# EAGLE board Adafruit 1.3in 128x64 OLED STEMMA QT (EAGLE 9.4.1)
REV: A
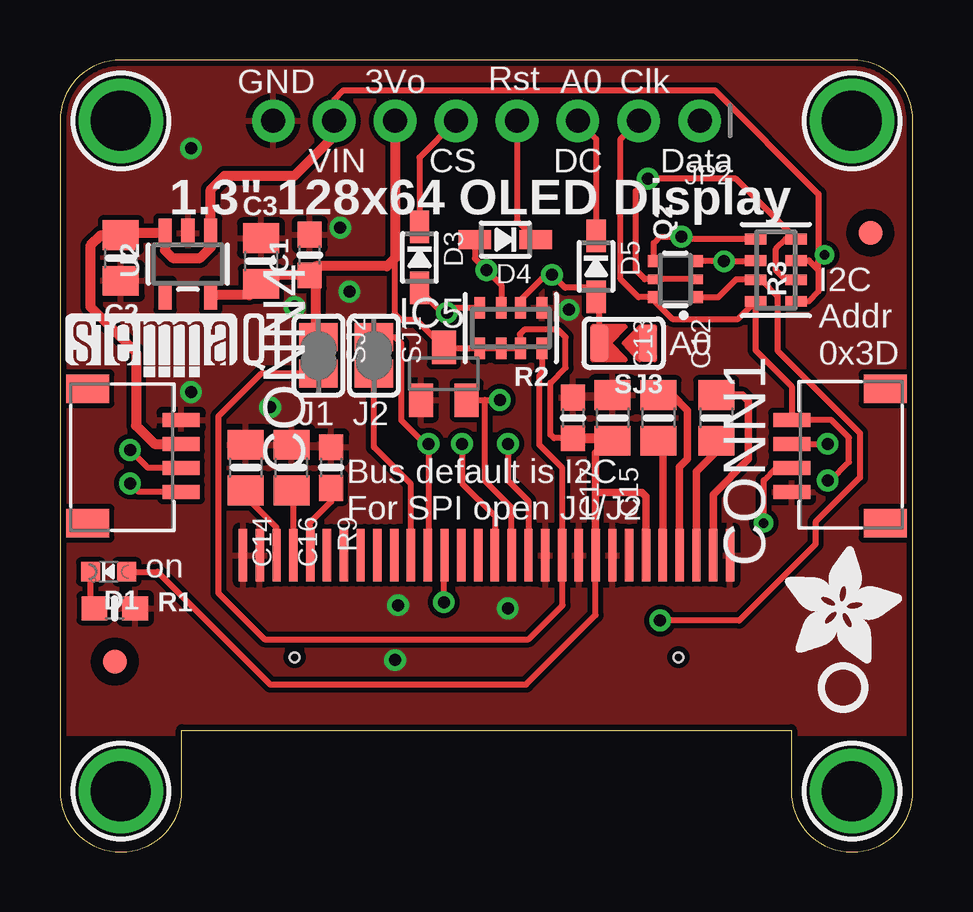
[diagram p0: board, top side]
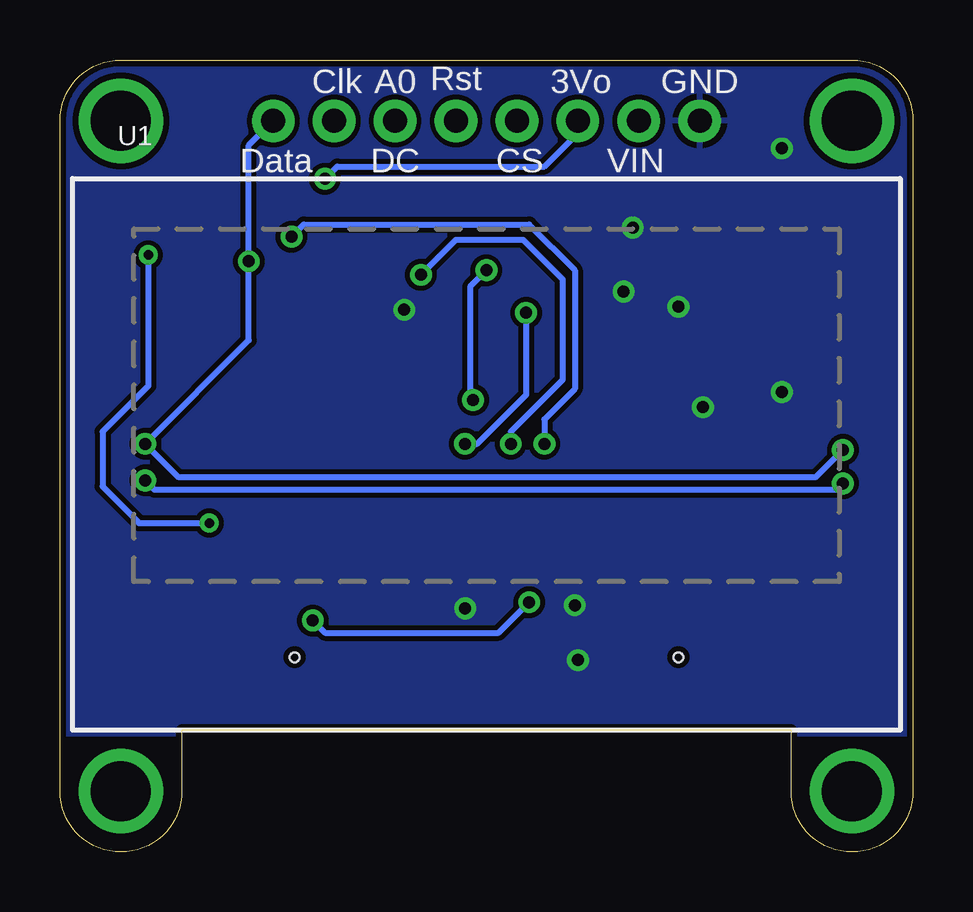
[diagram p1: board, bottom side, seen from below]

Size 35.56 x 33.02 mm. Coordinates in mm from the lower left corner, seen from the top.
Outline: 0,30.48 0,2.54 arc90 2.54,0 arc90 5.08,2.54 5.08,5.08 30.48,5.08 30.48,2.54 arc90 33.02,0 arc90 35.56,2.54 35.56,30.48 arc90 33.02,33.02 2.54,33.02 arc90 0,30.48
Copper layers (1*16): Top 0.035mm / dielectric 1.5mm / Bottom 0.035mm
Design rules "adafruit *": minimum track width 8mil, minimum drill 15.5mil, track to track 8mil, track to pad 8mil, pad to pad 8mil, via to via 8mil, smd to smd 8mil, copper to edge 10mil, drill to drill 8mil, minimum pad ring 10mil, minimum via ring 8mil, stop-mask expansion 2mil, vias tented up to drill 20mil, thermal gap 10mil

## Footprints (pad centres in the part's own frame; a part is rotated, then mirrored left to right if it is on the bottom)
0603-NO = smd 1.075 x 1: 1 -0.85,0; 2 0.85,0
0805-NO = smd 1.24 x 1.5: 1 -0.95,0; 2 0.95,0
JST_SH4 = smd 0.6 x 1.55: 1 -1.5,2.514; 2 -0.5,2.514; 3 0.5,2.514; 4 1.5,2.514 | smd 1.2 x 1.8: MT1 -2.8,-1.386; MT2 2.8,-1.386
CHIPLED_0603_NOOUTLINE = smd 0.8 x 0.8: A 0,-0.75; C 0,0.75
SOD-323 = smd 1.35 x 0.8: A 1.27,0; C -1.27,0
FIDUCIAL_1MM = smd 1 x 1: 1 0,0
SOT23 = smd 1 x 1.4: 1 -0.95,-1.1; 2 0.95,-1.1; 3 0,1.1
1X08_ROUND_70 = drill 1 pad 1.778: 1 -8.89,0; 2 -6.35,0; 3 -3.81,0; 4 -1.27,0; 5 1.27,0; 6 3.81,0; 7 6.35,0; 8 8.89,0
SOT363 = smd 0.5 x 0.5: 1 -0.75,-0.9; 3 0.75,-0.9; 4 0.75,0.9; 6 -0.75,0.9 | smd 0.4 x 0.5: 2 0,-0.9; 5 0,0.9
RESPACK_4X0603 = smd 0.45 x 0.9: 1 -1.3,-0.85; 2 -0.4,-0.85; 3 0.4,-0.85; 4 1.3,-0.85; 5 1.3,0.85; 6 0.4,0.85; 7 -0.4,0.85; 8 -1.3,0.85
SOLDERJUMPER_CLOSEDWIRE = smd 1.168 x 1.6: 1 -0.762,0; 2 0.762,0 | smd 0.635 x 0.203: WIRE 0,0
SOLDERJUMPER_ARROW_NOPASTE = smd 0.762 x 1.524: 1 -1.016,0; 2 1.016,0
UG-2864HSWEG01_1.3_WRAPAROUND = smd 0.35 x 2.2 bottom: 1 -10.15,-0.2; 2 -9.45,-0.2; 3 -8.75,-0.2; 4 -8.05,-0.2; 5 -7.35,-0.2; 6 -6.65,-0.2; 7 -5.95,-0.2; 8 -5.25,-0.2; 9 -4.55,-0.2; 10 -3.85,-0.2; 11 -3.15,-0.2; 12 -2.45,-0.2; 13 -1.75,-0.2; 14 -1.05,-0.2; 15 -0.35,-0.2; 16 0.35,-0.2; 17 1.05,-0.2; 18 1.75,-0.2; 19 2.45,-0.2; 20 3.15,-0.2; 21 3.85,-0.2; 22 4.55,-0.2; 23 5.25,-0.2; 24 5.95,-0.2; 25 6.65,-0.2; 26 7.35,-0.2; 27 8.05,-0.2; 28 8.75,-0.2; 29 9.45,-0.2; 30 10.15,-0.2 | hole 0.4: -8,-4.45; 8,-4.45
SOT23-5 = smd 0.55 x 1.2: 1 -0.95,-1.3; 2 0,-1.3; 3 0.95,-1.3; 4 0.95,1.3; 5 -0.95,1.3
MOUNTINGHOLE_2.5_PLATED = drill 2.5 pad 3.2: P$1 0,0

## Placement (x,y rotation side)
C1  0.1uF  [0603-NO]  10.41,24.89 90 top
C2  10uF  [0805-NO]  2.54,24.77 270 top
C3  10uF  [0805-NO]  8.38,24.64 90 top
C12  2.2uF  [0805-NO]  27.36,18.1 90 top
C13  2.2uF  [0805-NO]  24.95,18.1 90 top
C14  10uF  [0805-NO]  7.75,16.03 270 top
C15  10uF  [0805-NO]  23.04,18.1 270 top
C16  10uF  [0805-NO]  9.65,16.03 270 top
C17  1uF  [0603-NO]  21.38,18.1 270 top
CONN1  STEMMA_I2C_QT  [JST_SH4]  33.02,16.51 90 top
CONN4  STEMMA_I2C_QT  [JST_SH4]  2.54,16.51 270 top
D1  GREEN  [CHIPLED_0603_NOOUTLINE]  2.03,11.68 90 top
D3  1N4148  [SOD-323]  14.99,24.79 270 top
D4  1N4148  [SOD-323]  18.57,25.53 180 top
D5  1N4148  [SOD-323]  22.35,24.41 270 top
FID3  FIDUCIAL_1MM  [FIDUCIAL_1MM]  2.29,7.94 0 top
FID4  FIDUCIAL_1MM  [FIDUCIAL_1MM]  33.78,25.82 0 top
IC5  APX803  [SOT23]  16,19.94 0 top
JP2  [1X08_ROUND_70]  17.78,30.48 180 top
Q2  BSS138  [SOT363]  25.65,23.88 90 top
R1  10K  [0603-NO]  2.29,10.16 0 top
R2  10K  [RESPACK_4X0603]  18.8,21.84 180 top
R3  10K  [RESPACK_4X0603]  29.84,24.26 90 top
R9  390K  [0603-NO]  11.3,16.03 270 top
SJ1  [SOLDERJUMPER_CLOSEDWIRE]  13.09,20.7 270 top
SJ2  [SOLDERJUMPER_CLOSEDWIRE]  10.77,20.7 270 top
SJ3  [SOLDERJUMPER_ARROW_NOPASTE]  23.5,21.21 180 top
U1  UG-2864HSWEG01  [UG-2864HSWEG01_1.3_WRAPAROUND]  17.78,12.57 0 bottom
U2  AP2112K-3.3  [SOT23-5]  5.33,24.51 180 top
U$1  MOUNTINGHOLE2.5  [MOUNTINGHOLE_2.5_PLATED]  2.54,30.48 0 top
U$8  [ADAFRUIT_5MM]  30.23,7.87 0 top
U$17  MOUNTINGHOLE2.5  [MOUNTINGHOLE_2.5_PLATED]  33.02,30.48 0 top
U$19  MOUNTINGHOLE2.5  [MOUNTINGHOLE_2.5_PLATED]  2.54,2.54 0 top
U$21  MOUNTINGHOLE2.5  [MOUNTINGHOLE_2.5_PLATED]  33.02,2.54 0 top
U$25  [PCBFEAT-REV-040]  32.64,6.86 0 top
U$31  [STEMMAQT]  0.25,19.81 0 top

## Library data of the parts
C1-C3 C12-C17 CONN1 CONN4 D1 D3-D5 JP2 Q2 R1-R3 R9 SJ1 SJ2 U2 U$8 U$25 = microbuilder
FID3 FID4 SJ3 U$1 U$17 U$19 U$21 = microbuilder; BOM: EXCLUDE
IC5 = adafruit
U1 = adafruit_display
U$31 = silks

## Nets
3.3V: C1.1 C3.1 C15.2 C17.2 D1.A IC5.3 JP2.6 Q2.2 Q2.5 R2.5 R2.6 R2.7 R3.2 R3.4 SJ2.1 U1.6 U1.9 U2.5
CS_3.3V: D3.A R2.4 U1.13
CS_5.0V: D3.C JP2.5
D0/SCLK/SCK_3.3V: Q2.1 R3.7 U1.18
D1/MOSI/SDA1_3.3V: Q2.4 R3.5 SJ1.1 U1.19
DC/SA0_3.3V: D5.A R2.2 SJ3.2 U1.15
DC/SA0_5.0V: D5.C JP2.3
GND: C1.2 C2.2 C3.2 C14.1 C15.1 C16.1 C17.1 CONN1.1 CONN4.1 IC5.1 JP2.8 R1.2 R2.1 R9.1 SJ3.1 U1.1 U1.8 U1.10 U1.12 U1.29 U1.30 U2.2
N$2: D1.C R1.1
N$9: R2.8 SJ2.2 U1.11
N$10: R9.2 U1.26
N$11: C12.2 U1.2
N$12: C12.1 U1.3
N$13: C13.2 U1.4
N$14: C13.1 U1.5
N$15: C14.2 U1.28
N$16: C16.2 U1.27
N$17: SJ1.2 U1.20
RST_3.3V: D4.A IC5.2 R2.3 U1.14
RST_5.0V: D4.C JP2.4
SCL: CONN1.4 CONN4.4 JP2.2 Q2.6 R3.8
SDA: CONN1.3 CONN4.3 JP2.1 Q2.3 R3.6
VCC: C2.1 CONN1.2 CONN4.2 JP2.7 R3.1 R3.3 U2.1 U2.3

## Tracks (layer width: path | path; a pad name or v marks a point on that pad's centre or on a via)
3.3V  (via drill 0.5)
  Top 0.254: Q2.2 Q2.5 24.38,23.88 24,24.26 24,27.56 v24.51,28.07 28.18,28.07 R3.4 30.26,25.56 29.84,25.15 29.84,24.26 30.25,23.86 R3.2 | R2.7 19.18,20.99 | 19.18,20.99 R2.6 R2.5 16.05,20.99 IC5.3 14.86,22.18 14.22,22.18 13.97,22.44 13.97,24.89 | D1.A 4.06,11.68 8.76,6.99 19.43,6.99 22.33,9.88 22.33,12.7 | C17.2 20.6,17.25 20.45,17.4 20.45,19.56 21.08,20.19 21.08,21.46 20.77,21.77 19.36,21.77 19.18,21.59 19.18,20.99
  Top 0.305: U1.9 22.33,12.7 22.33,14.99 | 22.33,14.99 22.33,16.64 22.93,17.25 | U1.6 24.43,14.81 24.26,14.99 22.33,14.99
  Top 0.406: JP2.6 13.97,24.89 13.97,24.77 13.63,24.42 10.67,24.42 10.67,24.04 | U2.5 7.91,23.21 C3.1 8.38,23.79 8.64,24.04 C1.1 10.67,24.04 | C17.2 22.93,17.25 C15.2 | SJ2.1 10.67,21.57 10.67,24.04
  Bottom 0.254: v24.51,28.07 24,28.57 15.37,28.57 13.97,29.97 JP2.6
CS_3.3V  (via drill 0.5)
  Top 0.254: D3.A 14.99,23.43 15.93,22.48 v16.13,22.48 16.34,22.69 R2.4 | v18.68,17.02 18.68,15.49 19.53,14.64 U1.13
  Bottom 0.254: v16.13,22.48 16.13,19.06 18.17,17.02 v18.68,17.02
CS_5.0V
  Top 0.254: JP2.5 14.99,28.96 D3.C
D0/SCLK/SCK_3.3V  (via drill 0.5)
  Top 0.254: Q2.1 27.44,23.13 28.19,23.88 28.98,23.88 R3.7 29.24,23.86 29.91,23.18 29.91,20.9 33.35,17.46 33.35,15.61 31.5,13.75 31.5,12.83 28.32,9.65 v25.02,9.65 | v16,10.41 16,12.35 U1.18
  Bottom 0.254: v25.02,9.65 24.51,9.14 17.27,9.14 v16,10.41
D1/MOSI/SDA1_3.3V  (via drill 0.5)
  Top 0.254: Q2.4 24.75,25.39 25.02,25.65 v25.91,25.65 26,25.56 R3.5 | v15.37,17.02 15.37,16.86 | 15.37,16.86 15.37,12.41 U1.19 | SJ1.1 13.97,21.46 14.22,21.21 14.22,18 15.37,16.86
  Bottom 0.254: v25.91,25.65 25.4,26.16 16,26.16 14.1,24.26 14.1,19.3 15.37,18.03 v15.37,17.02
DC/SA0_3.3V  (via drill 0.5)
  Top 0.254: R2.2 19.2,23.01 20.38,24.19 v20.51,24.07 21.06,23.52 21.97,23.52 D5.A 22.48,23.01 SJ3.2 | v16.76,17.02 16.76,15.37 18.13,14 U1.15
  Bottom 0.254: v20.51,24.07 19.05,25.53 16.26,25.53 14.61,23.88 14.61,19.68 16.76,17.53 v16.76,17.02
DC/SA0_5.0V
  Top 0.254: JP2.3 22.35,29.72 D5.C
GND  (via drill 0.5)
  other vias: 8.76,18.54 5.46,19.18 11.68,26.04 5.46,29.34 21.21,22.61 14.1,10.29 13.97,8 18.67,10.16 9.78,22.73 12.06,23.37
  pour Top: 0,33.02 35.56,33.02 35.56,4.95 0,4.95
  pour Bottom: 0,33.02 35.56,33.02 35.56,4.95 0,4.95
N$2
  Top 0.254: R1.1 1.28,10.31 D1.C
N$9
  Top 0.254: R2.8 20.1,19.98 19.97,19.85 19.97,16.99 20.93,16.03 U1.11 20.95,12.35 20.95,10.29 19.54,8.87 8.53,8.87 6.6,10.79 6.6,18.16 8.38,19.94 SJ2.2
N$10
  Top 0.254: U1.26 10.43,13.73 11.3,14.61 R9.2
N$11
  Top 0.305: U1.2 27.23,14.91 28.7,16.38 28.7,18.8 28.45,19.05 C12.2
N$12
  Top 0.305: U1.3 26.53,15.86 27.36,16.69 C12.1
N$13
  Top 0.305: U1.4 25.83,16.05 26.16,16.38 26.16,18.41 25.53,19.05 C13.2
N$14
  Top 0.305: U1.5 25.13,16.97 C13.1
N$15
  Top 0.254: U1.28 9.03,13.54 7.75,14.82 C14.2
N$16
  Top 0.254: U1.27 9.73,15 C16.2
N$17
  Top 0.254: U1.20 14.63,15.34 13.09,16.88 SJ1.2
RST_3.3V  (via drill 0.5)
  Top 0.254: U1.14 18.83,14.36 17.7,15.49 17.7,18.85 v18.34,18.85 18.33,18.84 IC5.2 | R2.3 18.4,23.64 v17.78,24.26 17.3,24.74 D4.A
  Bottom 0.254: v17.78,24.26 18.46,23.57 18.46,18.97 v18.34,18.85
RST_5.0V
  Top 0.254: JP2.4 19.05,26.31 D4.C
SCL  (via drill 0.5)
  Top 0.254: CONN4.4 3.28,15.01 v2.92,15.37 | v32,15.49 32.07,15.43 32.89,16.26 32.89,17.27 32.16,18.01 CONN1.4 30.51,19.41 29,20.92 R3.8 28.26,22.23 25.53,22.23 24.75,23 Q2.6 24.12,23.13 23.37,23.88 23.37,29.72 JP2.2
  Bottom 0.254: v2.92,15.37 3.17,15.11 31.62,15.11 v32,15.49
SDA  (via drill 0.5)
  Top 0.254: R3.6 28.96,24.63 v27.69,24.63 Q2.3 | CONN1.3 v32,17.01 v32,17.02 | CONN4.3 3.67,16.01 v2.92,16.76
  Bottom 0.254: v2.92,16.76 4.06,15.62 30.61,15.62 v32,17.02 27.69,21.34 v27.69,24.63 27.69,29.46 JP2.1
VCC  (via drill 0.39)
  Top 0.254: R3.3 31.22,24.66 31.62,24.26 | 31.62,24.26 31.62,23.37 31.21,22.96 R3.1 | 31.75,24.77 v31.88,24.89 | 31.75,24.77 31.62,24.77 31.62,27.43 27.3,31.75 11.81,31.75 11.43,31.37 JP2.7 | v29.34,13.72 29.34,15.49 29.85,16.01 CONN1.2 | 31.62,24.26 31.62,24.64 31.75,24.77
  Top 0.406: JP2.7 11.43,29.84 9.78,28.19 6.86,28.19 6.28,27.62 U2.1 6.28,25.21 5.84,24.77 4.7,24.77 4.38,25.08 U2.3 2.64,25.81 C2.1 1.71,25.71 1.27,25.27 1.27,22.73 3.17,20.83 3.17,17.78 3.94,17.01 CONN4.2
  Bottom 0.254: v31.88,24.89 31.88,19.43 33.78,17.53 33.78,15.24 32.26,13.72 v29.34,13.72

## Text on the board
tPlace: GND | 3Vo | Rst | A0 | Clk | VIN | CS | DC | Data | 1.3" 128x64 OLED Display | A0 | I2C / Addr / 0x3D | J1 | J2 | Bus default is I2C / For SPI open J1/J2 | on
bPlace: GND | 3Vo | Rst | A0 | Clk | VIN | CS | DC | Data